# Altium PCB 基于单片机的空调温度控制系统.PcbDoc
Units mm, origin at the board's own origin, x right, y up, seen from the top; angles counter-clockwise.
Board outline 80 x 85 mm, 2 copper layers (Top Layer, Bottom Layer); 27 components, 29 nets, 151 pads, 0 vias.
Unrouted connection lines stored in the file: 9.
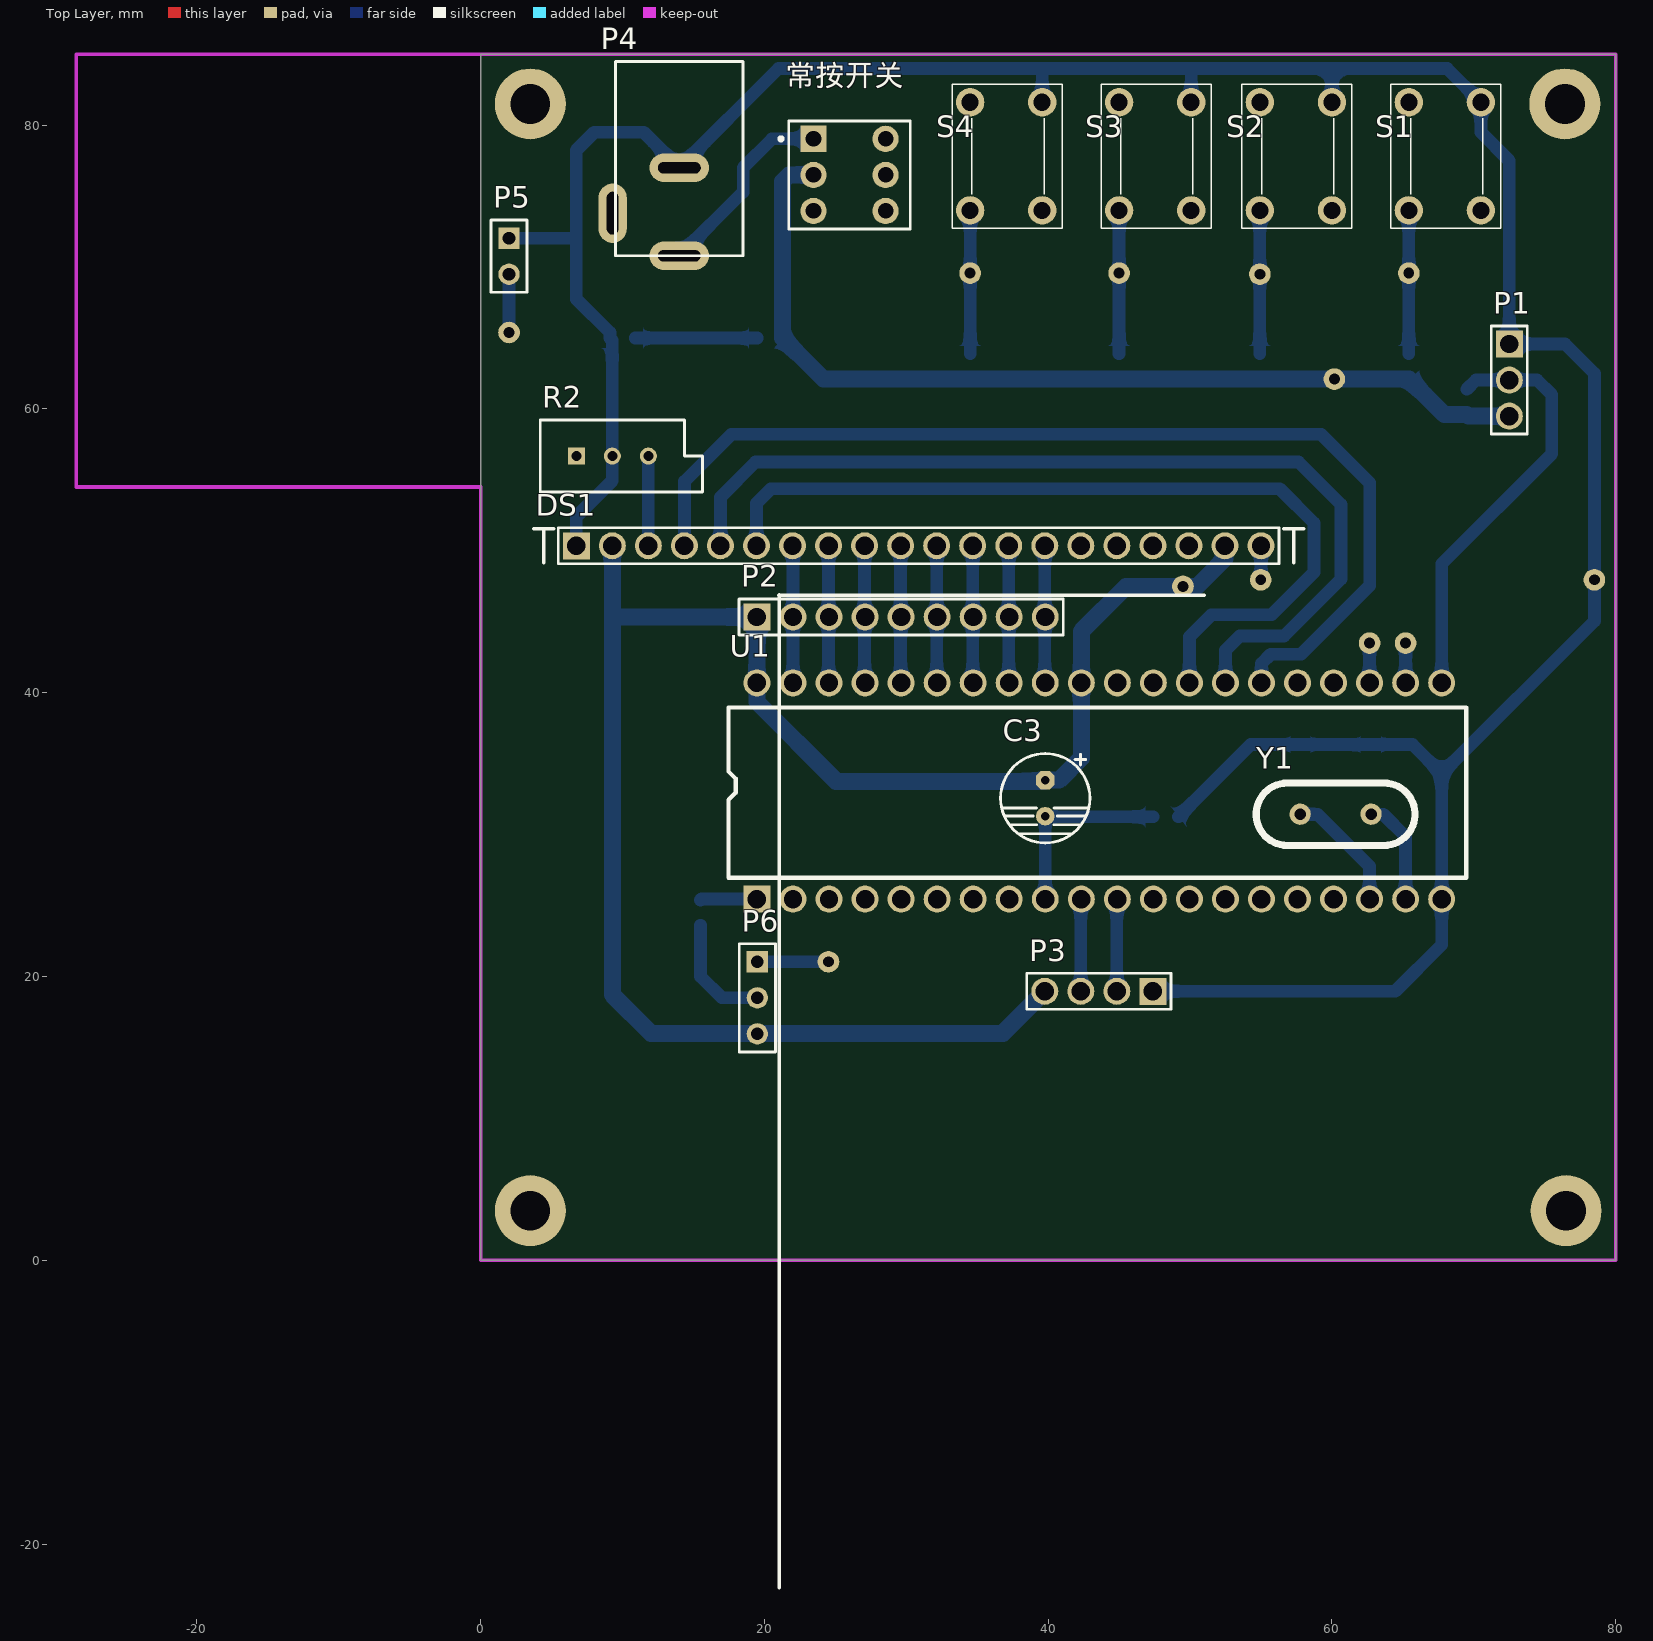
[diagram p0: Top Layer view]
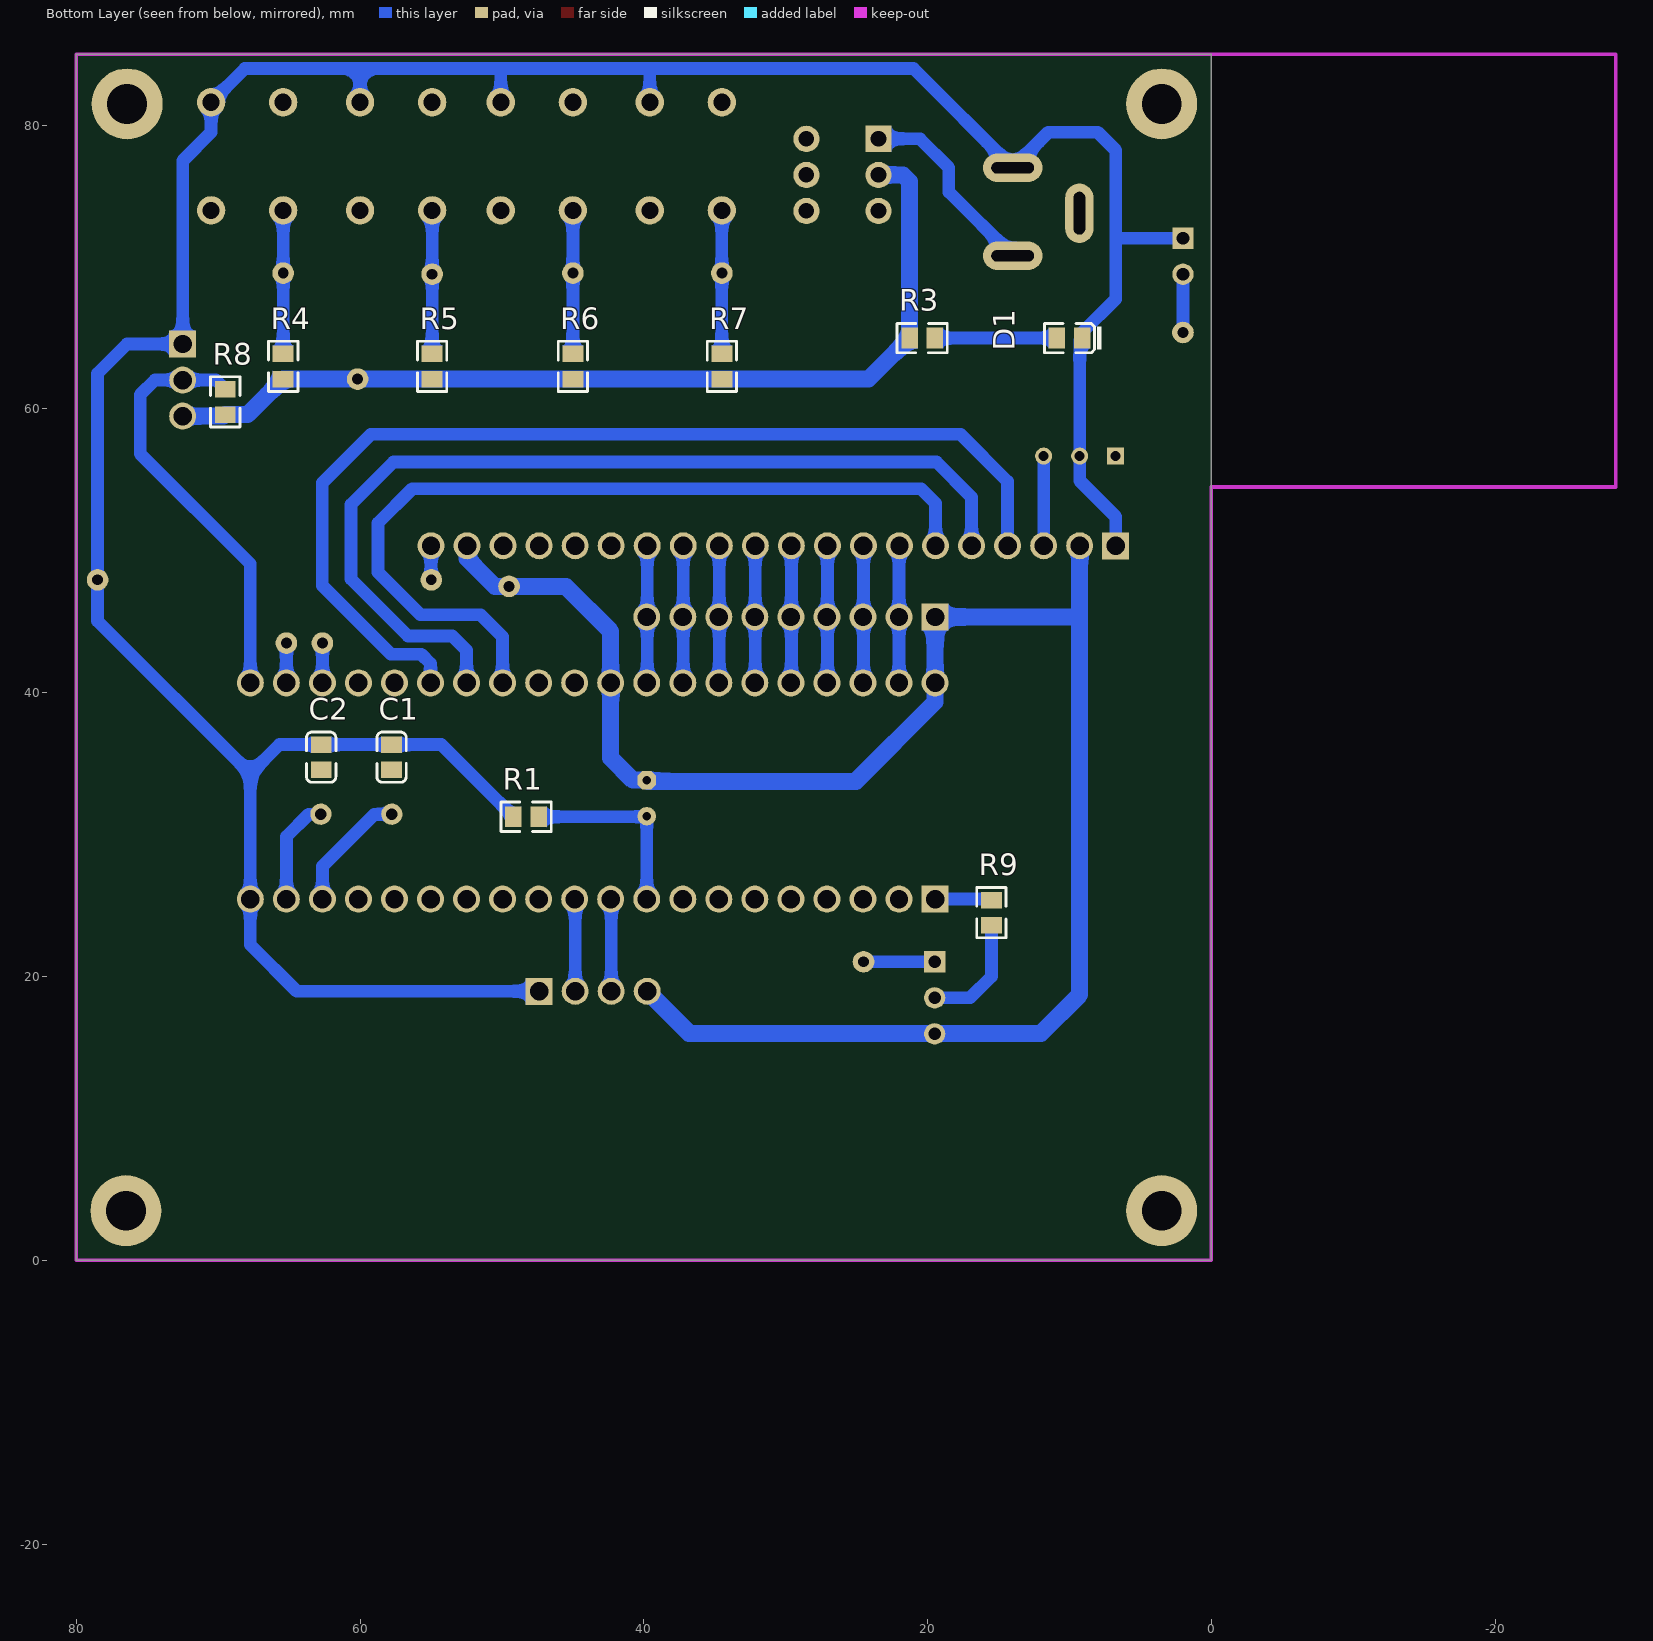
[diagram p1: Bottom Layer view, seen from below]
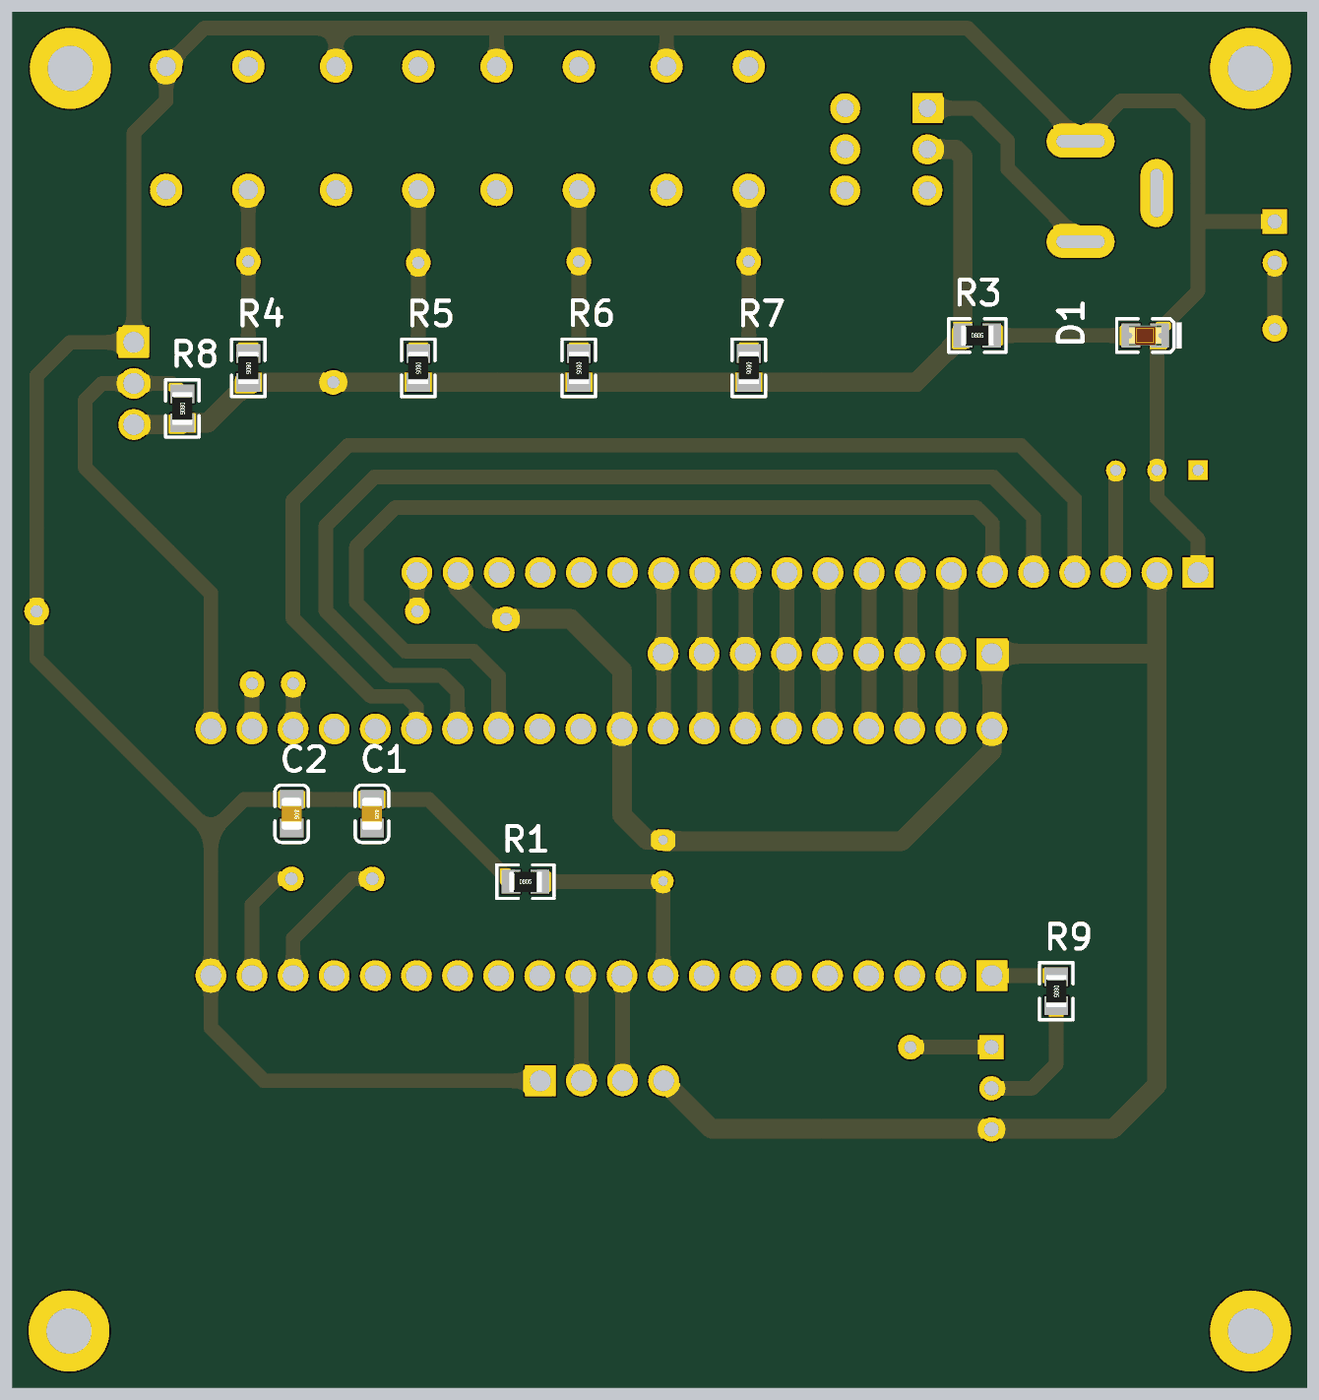
[diagram p2: 3D render of the assembled board from below, using the file's embedded part models]

## Layer stack, top to bottom
Top Solder: solder mask 0.0102, Solder Resist, Dk 3.5
Top Layer: signal copper 0.0356
Dielectric 1: dielectric 0.32, FR-4, Dk 4.8
Bottom Layer: signal copper 0.0356
Bottom Solder: solder mask 0.0102, Solder Resist, Dk 3.5

## Board outline
0,0 0,85 80,85 80,0

## Design rules (kind name [scope] priority, off if disabled: settings)
Clearance [All] p1: gap=0.254 ignorepadtopadclearanceinfootprint=FALSE except(0: Arc-Hole Track-Hole SMDPad-Hole THPad-Hole Via-Hole Fill-Hole Poly-Hole Region-Hole Text-Hole)
PolygonConnect [All] p1: connectstyle=Relief reliefconductorwidth=0.254 reliefentries=4 polygonreliefangle="90 Angle" airgapwidth=0.254
RoutingVias [All] p1: holewidth=0.711 width=1.27 viastyle="Through Hole" minholewidth=0.711 minwidth=1.27 maxholewidth=0.711 maxwidth=1.27
SolderMaskExpansion [All] p1: expansion=0.102
Width [InNet('VCC')] p1: maxlimit=1.3 minlimit=1.2 preferedwidth=1.2
Width Width_1 [All] p2: maxlimit=1 minlimit=0.9 preferedwidth=0.9
30 further rules are at their usual default settings.

## Components (designator, comment, footprint, x,y, rotation, side; value= is the part's Value field where it differs from the comment)
C1 "22pF (220) 5% 50V" LC-0805_C 57.78,35.46 r270 bottom
C2 "22pF (220) 5% 50V" LC-0805_C 62.74,35.46 r270 bottom
C3 "Cap Pol1" RB.2.5/.6.3mm 39.793,32.568 r0 top value=10uF
D1 "红灯 0805" LC-0805_LED_S1 10,65 r0 bottom
DS1 "LCD-12864" LCD-12864 6.74,50.36 r0 top
P1 "DS18B20" HDR1X3#1 72.5,64.58 r270 top
P2 "Header 9" HDR1X9 19.473,45.34 r0 top
P3 "下载口" HDR1X4 47.38,18.96 r180 top
P4 "电源" DC插座 14,70.8 r270 top
P5 "电机" HDR1X2 2,72.04 r270 top
P6 "8550" HDR1X3#2 19.5,21.04 r270 top
R1 "10KΩ (1002) ±1%" LC-0805_R 48.3,31.26 r180 bottom
R2 "Pot" VR5 9.28,56.68 r0 top value=10K
R3 "510Ω (5100) ±1%" LC-0805_R 20.38,65 r180 bottom
R4 "10KΩ (1002) ±1%" LC-0805_R 65.42,63 r270 bottom
R5 "10KΩ (1002) ±1%" LC-0805_R 54.92,63 r270 bottom
R6 "10KΩ (1002) ±1%" LC-0805_R 45,63 r270 bottom
R7 "10KΩ (1002) ±1%" LC-0805_R 34.5,63 r270 bottom
R8 "4.7KΩ (1002) ±1%" LC-0805_R 69.5,60.5 r270 bottom
R9 "100Ω (1002) ±1%" LC-0805_R 15.5,24.5 r270 bottom
S1 "SW-DPST" Switch6*6 65.42,74 r90 top
S2 "SW-DPST" Switch6*6 54.92,74 r90 top
S3 "SW-DPST" Switch6*6 45,74 r90 top
S4 "SW-DPST" Switch6*6 34.5,74 r90 top
U1 "STC12C5A60S2" DIP40 19.473,25.456 r90 top
Y1 "XTAL" XTAL 57.76,31.44 r0 top
常按开关 "SW-DPDT" DPDT-6 26,76.5 r0 top

## Footprints (in the part's own frame and the unit in brackets; to place one, negate y for a bottom-side part, rotate by r counter-clockwise, add the part's x,y. Pads: shape width x height; smd on the part's side, far side on the other; paste and mask are expansions set on the pad)
DC插座 [mm]
  oval 2x4.2 hole 3 slot 0.8 at 0 deg: 1(0,0) 2(-6.2,0)
  oval 4.2x2 hole 3 slot 0.8 at 90 deg: 3(-3,-4.7)
  silkscreen extent -13.7,-4.5 0,4.5
DIP40 [mm]
  rect 1.9x1.9 hole 1.3: 1(0,0)
  round 1.9 hole 1.3: 2(0,-2.54) 3(0,-5.08) 4(0,-7.62) 5(0,-10.16) 6(0,-12.7) 7(0,-15.24) 8(0,-17.78) 9(0,-20.32) 10(0,-22.86) 11(0,-25.4) 12(0,-27.94) 13(0,-30.48) 14(0,-33.02) 15(0,-35.56) 16(0,-38.1) 17(0,-40.64) 18(0,-43.18) 19(0,-45.72) 20(0,-48.26) 21(15.24,-48.26) 22(15.24,-45.72) 23(15.24,-43.18) 24(15.24,-40.64) 25(15.24,-38.1) 26(15.24,-35.56) 27(15.24,-33.02) 28(15.24,-30.48) 29(15.24,-27.94) 30(15.24,-25.4) 31(15.24,-22.86) 32(15.24,-20.32) 33(15.24,-17.78) 34(15.24,-15.24) 35(15.24,-12.7) 36(15.24,-10.16) 37(15.24,-7.62) 38(15.24,-5.08) 39(15.24,-2.54) 40(15.24,0)
  silkscreen extent 1.5,-50 13.5,2
DPDT-6 [mm] "Switch; 6 Leads"
  rect 1.85x1.85 hole 1.1: 1(-2.54,2.54)
  round 1.85 hole 1.1: 2(-2.54,0) 3(-2.54,-2.54) 4(2.54,-2.54) 5(2.54,0) 6(2.54,2.54)
  silkscreen extent -4.96,-3.81 4.28,3.81
HDR1X2 [mm] "Connector; Header; 2 Position"
  rect 1.5x1.5 hole 0.9: 1(0,0)
  round 1.5 hole 0.9: 2(2.54,0)
  silkscreen extent -1.27,-1.27 3.81,1.27
HDR1X3#1 [mm] "Connector; Header; 3 Position"
  rect 1.9x1.9 hole 1.3: 1(0,0)
  round 1.9 hole 1.3: 2(2.54,0) 3(5.08,0)
  silkscreen extent -1.27,-1.27 6.35,1.27
HDR1X3#2 [mm] "Connector; Header; 3 Position"
  rect 1.5x1.5 hole 0.9: 1(0,0)
  round 1.5 hole 0.9: 2(2.54,0) 3(5.08,0)
  silkscreen extent -1.27,-1.27 6.35,1.27
HDR1X4 [mm] "Connector; Header; 4 Position"
  rect 1.9x1.9 hole 1.3: 1(0,0)
  round 1.9 hole 1.3: 2(2.54,0) 3(5.08,0) 4(7.62,0)
  silkscreen extent -1.27,-1.27 8.89,1.27
HDR1X9 [mm] "Connector; Header; 9 Position"
  rect 1.9x1.9 hole 1.3: 1(0,0)
  round 1.9 hole 1.3: 2(2.54,0) 3(5.08,0) 4(7.62,0) 5(10.16,0) 6(12.7,0) 7(15.24,0) 8(17.78,0) 9(20.32,0)
  silkscreen extent -1.27,-1.27 21.59,1.27
LC-0805_C [mm]
  rect 1.16x1.47 smd: 1(-0.89,0) 2(0.89,0)
  silkscreen extent -1.77,-1.04 1.77,1.04, body extent -1,-0.63 1,0.62, height 0.77
LC-0805_LED_S1 [mm]
  rect 1.16x1.47 smd: A(0.89,0) K(-0.89,0)
  silkscreen extent -2.24,-1.04 1.77,1.03, body extent -1.01,-0.63 1.01,0.62, height 1.1
LC-0805_R [mm]
  rect 1.16x1.47 smd: 1(-0.89,0) 2(0.89,0)
  silkscreen extent -1.77,-1.04 1.77,1.03, body extent -1,-0.63 1,0.62, height 0.49
LCD-12864 [mm]
  rect 1.9x1.9 hole 1.3: 1(0,0)
  round 1.9 hole 1.3: 2(2.54,0) 3(5.08,0) 4(7.62,0) 5(10.16,0) 6(12.7,0) 7(15.24,0) 8(17.78,0) 9(20.32,0) 10(22.86,0) 11(25.4,0) 12(27.94,0) 13(30.48,0) 14(33.02,0) 15(35.56,0) 16(38.1,0) 17(40.64,0) 18(43.18,0) 19(45.72,0) 20(48.26,0)
  silkscreen extent -3,-1.27 51.26,1.27
RB.2.5/.6.3mm [mm]
  oct 1.3x1.3 hole 0.6: 1(0,1.27)
  round 1.3 hole 0.6: 2(0,-1.27)
  silkscreen extent -3.15,-3.15 3.15,3.15
Switch6*6 [mm]
  round 2 hole 1.2: 1(0,0) 2(7.62,0) 3(0,-5.08) 4(7.62,-5.08)
  silkscreen extent -1.27,-6.48 8.89,1.27
VR5 [mm] "Thru-Hole; 3 Leads"
  rect 1.2x1.2 hole 0.7: 1(-2.54,0)
  round 1.2 hole 0.7: 2(0,0) 3(2.54,0)
  silkscreen extent -5.08,-2.54 6.35,2.54
XTAL [mm]
  round 1.5 hole 0.8: 1(0,0) 2(5,0)
  silkscreen extent -3.1,-2.2 8.1,2.2

## Part data
C1 C2: library part "0805 22pF (220) 5% 50V", "贴片电容", Package=0805, SuppliersPartNumber=C1804, ComponentLink1Description=供应, ComponentLink1URL=http://www.szlcsc.com/product/details_2156.html, Supplier=LC
C3: "Polarized Capacitor (Radial)", LatestRevisionDate=17-Jul-2002, LatestRevisionNote="Re-released for DXP Platform.", PackageDescription="Polarized Capacitor (Radial); 2 Leads", PackageReference=RB7.6-15, Published=8-Jun-2000, Publisher="Altium Limited"
D1: library part "0805 红灯", "发光二极管", Package=0805, SuppliersPartNumber=C2295, ComponentLink1Description=供应, ComponentLink1URL=http://www.szlcsc.com/product/details_2668.html, Supplier=LC
DS1: "带//不带字库"
P1 P6: library part "Header 3", "Header, 3-Pin", LatestRevisionDate=17-Jul-2002, LatestRevisionNote="Re-released for DXP Platform.", Publisher="Altium Limited"
P2: "Header, 9-Pin", LatestRevisionDate=17-Jul-2002, LatestRevisionNote="Re-released for DXP Platform.", Publisher="Altium Limited"
P3: library part "Header 4", "Header, 4-Pin", LatestRevisionDate=17-Jul-2002, LatestRevisionNote="Re-released for DXP Platform.", Publisher="Altium Limited"
P4 P5: library part "Header 2", "Header, 2-Pin", LatestRevisionDate=17-Jul-2002, LatestRevisionNote="Re-released for DXP Platform.", Publisher="Altium Limited"
R1 R4 R5 R6 R7 R8 R9: library part "0805 10KΩ (1002) 1%", "贴片电阻", Package=0805, SuppliersPartNumber=C17414, ComponentLink1URL=http://www.szlcsc.com/product/details_18102.html, Supplier=LC
  R1 R4 R5 R6 R7 R8: ComponentLink1Description=供应
  R9: ComponentLink1Description=供应商
R2: library part RPot, "Potentiometer", LatestRevisionDate=17-Jul-2002, LatestRevisionNote="Re-released for DXP Platform.", PackageDescription="Variable Resistor, Thru-Hole; 3 Leads", PackageReference=VR5, Published=8-Jun-2000, Publisher="Altium Limited", Set Position=0.5, Sim Note="Enter the Resistance value and the set point into parameter fields."
R3: library part "0805 510Ω (5100) 1%", "贴片电阻", Package=0805, SuppliersPartNumber=C17734, ComponentLink1Description=供应, ComponentLink1URL=http://www.szlcsc.com/product/details_18422.html, Supplier=LC
S1 S2 S3 S4: "Double-Pole, Single-Throw Switch", LatestRevisionDate=17-Jul-2002, LatestRevisionNote="Re-released for DXP Platform.", PackageDescription="Switch; 4 Leads", PackageReference=DPST-4, Published=24-Mar-1999, Publisher="Altium Limited"
U1: library part AT89C52, "8-Bit Microcontroller with 8K Flash ROM"
Y1: "Crystal Oscillator", LatestRevisionDate=17-Jul-2002, LatestRevisionNote="Re-released for DXP Platform.", PackageDescription="Crystal, Thru-Hole; 2 Leads; Body 3.1 x 8.2 mm (Dia.xH)", PackageReference=R38, Published=8-Jun-2000, Publisher="Altium Limited"
常按开关: "Double-Pole, Double-Throw Switch", LatestRevisionDate=17-Jul-2002, LatestRevisionNote="Re-released for DXP Platform.", PackageDescription="Switch; 6 Leads", PackageReference=DPDT-6, Published=24-Mar-1999, Publisher="Altium Limited"

## Free pads (board coordinates)
  round 5 hole 2.8: 0(3.5,3.5) 0(3.5,81.5) 0(76.42,81.5) 0(76.5,3.5)
  round 1.524 hole 0.762: 2(54.98,47.96) 9(34.5,69.58) 10(45,69.58) 11(54.92,69.5) 12(65.42,69.58) 13(62.653,43.5) 14(65.193,43.5) 15(49.5,47.5) 17(78.5,47.96) 18(60.17,62.11) 19(24.513,21.04) 20(2,65.39)

## Nets (pads, with @x,y where several pads share a name; then routed paths per layer and width w, separated by ;. In a path a pad name is that pad's centre, name@x,y a point inside that pad or via, vN(x,y) a via of type N, cw(c..) or ccw(c..) an arc to the next point about the centre after c; other vN are vias at no path point)
DB0: DS1.7 P2.2 U1.39 | length 9.7
  Bottom Layer w0.9: DS1.7 22.013,50.327 U1.39
DB1: DS1.8 P2.3 U1.38 | length 9.7
  Bottom Layer w0.9: DS1.8 24.52,40.729 U1.38
DB2: DS1.9 P2.4 U1.37 | length 9.7
  Bottom Layer w0.9: DS1.9 27.06,40.729 U1.37
DB3: DS1.10 P2.5 U1.36 | length 9.7
  Bottom Layer w0.9: DS1.10 29.6,40.729 U1.36
DB4: DS1.11 P2.6 U1.35 | length 9.7
  Bottom Layer w0.9: DS1.11 32.14,40.729 U1.35
DB5: DS1.12 P2.7 U1.34 | length 9.7
  Bottom Layer w0.9: DS1.12 34.68,40.729 U1.34
DB6: DS1.13 P2.8 U1.33 | length 9.7
  Bottom Layer w0.9: DS1.13 37.22,40.729 U1.33
DB7: DS1.14 P2.9 U1.32 | length 9.7
  Bottom Layer w0.9: DS1.14 39.76,40.729 U1.32
Dj: R9.1 U1.1 | length 4
  Bottom Layer w0.9: R9.1 15.566,25.456 U1.1
DS18B20_DQ: P1.2 R8.1 U1.21 | length 30.2
  Bottom Layer w0.9: U1.21 67.733,49.083 75.5,56.85 75.5,61 74.46,62.04 P1.2 70.15,62.04 R8.1
GND: C1.1 C2.1 D1.K DS1.1 DS1.20 P1.1 P3.1 P4.2 P5.1 pad.2 pad.17 R1.1 R2.2 S1.4 S2.4 S3.4 S4.4 U1.20 | length 226.3
  Bottom Layer w0.9: P5.1 6.7,72.04 6.74,72 ; DS1.1 6.74,52.4 9.28,54.94 R2.2 9.28,64.83 D1.K 9.11,65.39 6.74,67.76 6.74,72 ; S4.4 39.58,83.92 39.5,84 ; P3.1 64.46,18.96 67.733,22.233 U1.20 67.733,34.287 ; R1.1 54.28,36.35 C1.1 C2.1 65.67,36.35 67.733,34.287 ; S3.4 50.08,83.92 50,84 ; pad.2@55,47.86 DS1.20 ; S2.4 60,84 ; 6.74,72 6.74,78.24 8,79.5 11.5,79.5 P4.2 21,84 39.5,84 ; 39.5,84 50,84 ; 50,84 60,84 ; 60,84 68.12,84 S1.4 70.5,79.5 72.5,77.5 P1.1 76.42,64.58 78.5,62.5 pad.17 78.5,45.054 67.733,34.287
KEY1: pad.9 pad.14 R7.1 S4.1 U1.22 | length 12.9
  Bottom Layer w0.9: R7.1 pad.9 S4.1 ; U1.22 pad.14
KEY2: pad.10 pad.13 R6.1 S3.1 U1.23 | length 12.9
  Bottom Layer w0.9: R6.1 pad.10 S3.1 ; U1.23 pad.13
KEY3: pad.11 R5.1 S2.1 U1.24 | length 10.1
  Bottom Layer w0.9: R5.1 pad.11 S2.1
KEY4: pad.12 R4.1 S1.1 U1.25 | length 10.1
  Bottom Layer w0.9: R4.1 pad.12 S1.1
LCD12864_E: DS1.6 U1.28 | length 61.1
  Bottom Layer w0.9: DS1.6 19.44,53.36 20.46,54.38 56.32,54.38 58.74,51.96 58.74,48.5 55.74,45.5 51.5,45.5 49.953,43.953 U1.28
LCD12864_R/W: DS1.5 U1.27 | length 67.2
  Bottom Layer w0.9: DS1.5 16.9,53.78 19.38,56.26 57.64,56.26 60.63,53.27 60.63,48.01 56.62,44 53.5,44 52.493,42.993 U1.27
LCD12864_RS: DS1.4 U1.26 | length 74.2
  Bottom Layer w0.9: DS1.4 14.36,54.9 17.68,58.22 59.24,58.22 62.67,54.79 62.67,47.557 57.826,42.713 55.693,42.713 55.033,42.053 U1.26
NetD1_A: D1.A R3.2 | length 8.6
  Bottom Layer w0.9: D1.A R3.2
NetDS1_3: DS1.3 R2.3 | length 6.4
  Bottom Layer w0.9: R2.3@11.74,56.76 R2.3 DS1.3
NetP5_2: P5.2 P6.1 pad.19 pad.20 | length 9
  Bottom Layer w0.9: pad.20@2,65.5 P5.2 ; P6.1 pad.19
NetP6_2: P6.2 R9.2 | length 8.2
  Bottom Layer w0.9: R9.2 15.5,20 17,18.5 P6.2
RST: C3.2 R1.2 U1.9 | length 13.5
  Bottom Layer w0.9: U1.9 C3.2 39.831,31.26 R1.2
RXD1: P3.3 U1.10 | length 6.5
  Bottom Layer w0.9: P3.3 42.3,25.423 U1.10
TXD1: P3.2 U1.11 | length 6.5
  Bottom Layer w0.9: P3.2 44.84,25.423 U1.11
VCC: C3.1 DS1.2 DS1.19 P1.3 P2.1 P3.4 P6.3 pad.15 pad.18 R3.1 R4.2 R5.2 R6.2 R7.2 R8.2 U1.31 U1.40 常按开关.2 | length 195.6
  Bottom Layer w1.2: DS1.2 9.28,45.5 ; 常按开关.2 21.74,76.5 21.27,76.03 R3.1 24.16,62.11 R7.2 R6.2 R5.2 pad.18 R4.2 67.92,59.61 R8.2 69.61,59.5 P1.3 ; P3.4 36.8,16 12,16 9.28,18.72 9.28,45.5 ; DS1.19 52.46,49.47 50.49,47.5 pad.15 45.5,47.5 42.333,44.333 U1.31 42.333,35.393 40.778,33.838 C3.1 39.715,33.76 25.06,33.76 19.473,39.347 U1.40 P2.1 9.44,45.34 9.28,45.5
VCC_sw: P4.1 常按开关.1 | length 13.9
  Bottom Layer w0.9: P4.1 18.5,75.3 18.5,77 20.54,79.04 常按开关.1
X1: C2.2 U1.19 Y1.2 | length 7.5
  Bottom Layer w0.9: Y1.2 63.62,31.44 65.193,29.867 U1.19
X2: C1.2 U1.18 Y1.1 | length 8.7
  Bottom Layer w0.9: Y1.1@57.77,31.45 Y1.1 58.98,31.44 62.653,27.767 U1.18
pads on no net: DS1.15 DS1.16 DS1.17 DS1.18 P4.3 R2.1 S1.2 S1.3 S2.2 S2.3 S3.2 S3.3 S4.2 S4.3 U1.2 U1.3 U1.4 U1.5 U1.6 U1.7 U1.8 U1.12 U1.13 U1.14 U1.15 U1.16 U1.17 U1.29 U1.30 常按开关.3 常按开关.4 常按开关.5 常按开关.6

## Keep-outs
Keep-Out Layer:
  lines w0.254: -28.5,84.88 -28.5,54.5 0,54.5 0,0 80,0 80,85 -28.5,85

## Silkscreen, mask and mechanical layers (free items; w line width, h text height)
Top Overlay:
  lines w0.254: 21,46.86 51,46.86 ; 21.04,-23.08 21.04,46.92